# EAGLE board Dendro (EAGLE 9.6.2)
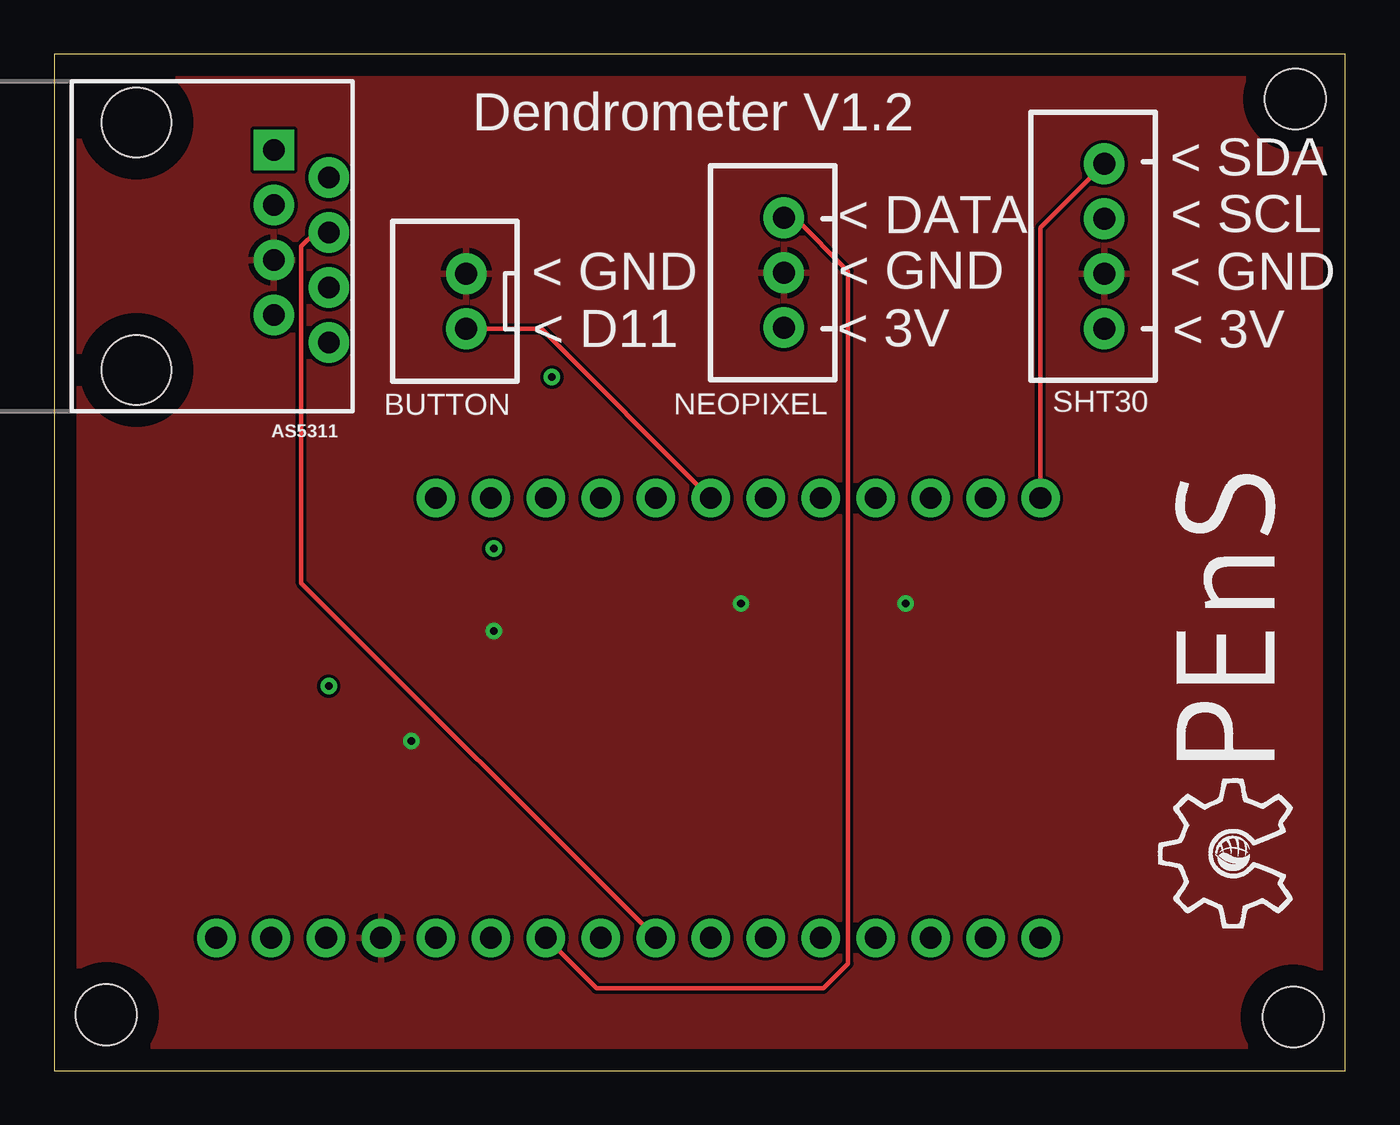
[diagram p0: board, top side]
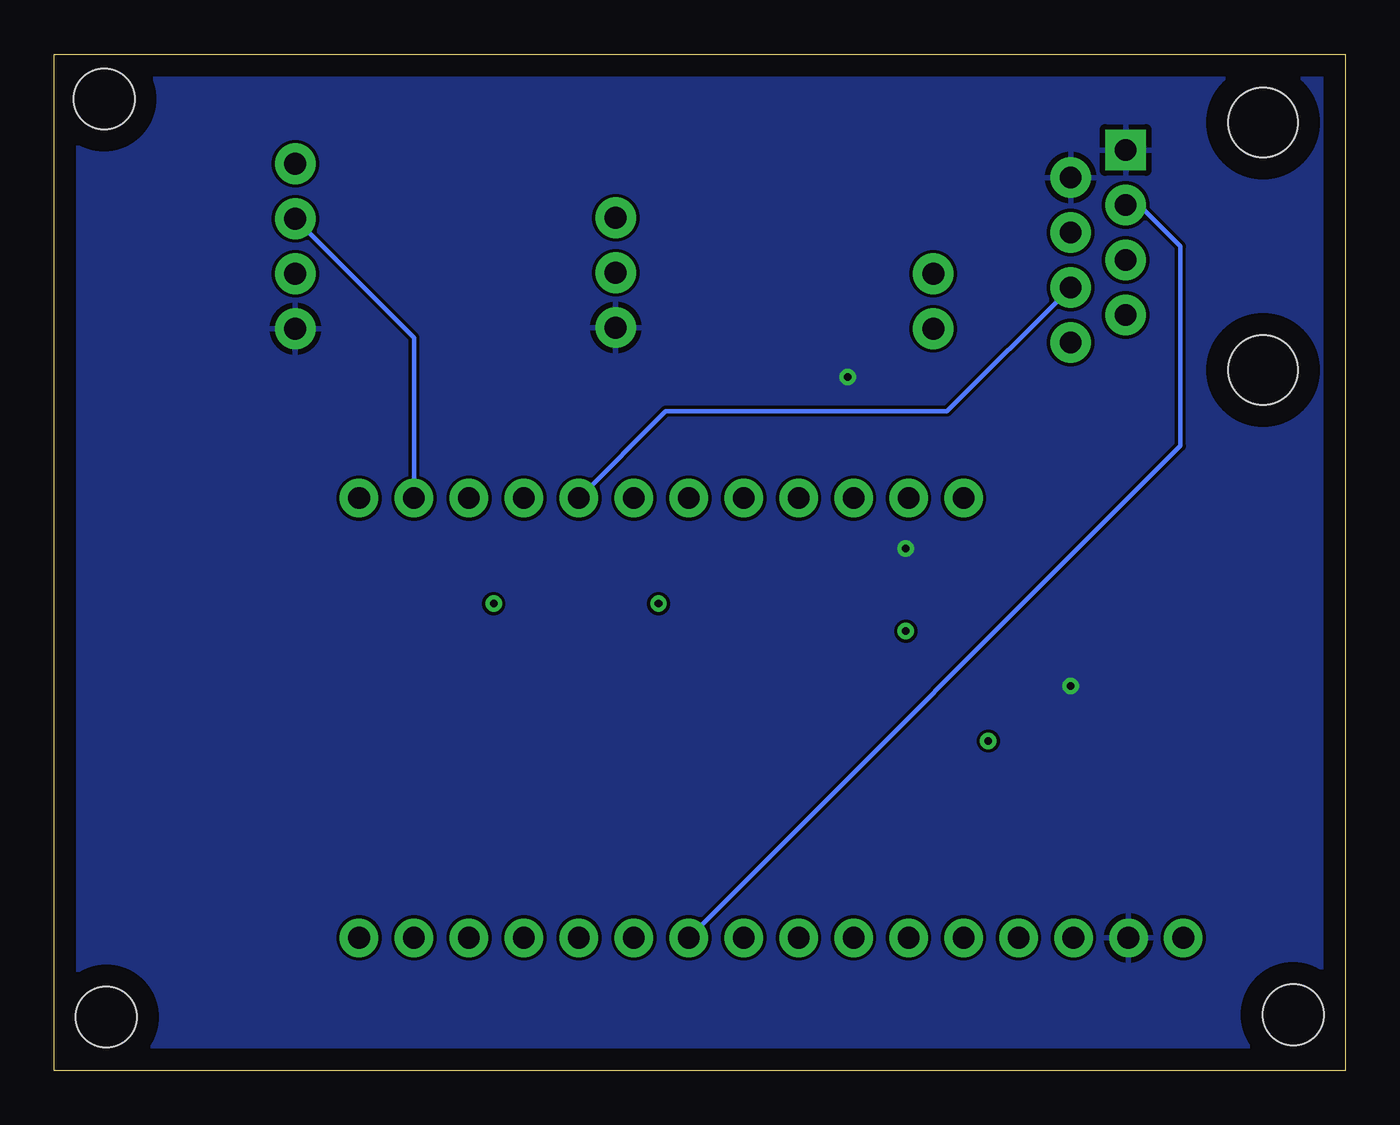
[diagram p1: board, bottom side, seen from below]

Size 59.69 x 46.98 mm. Coordinates in mm from the lower left corner, seen from the top.
Outline: 0,0 59.69,0 59.69,46.98 0,46.98 0,0
Copper layers (1*16): Top 0.035mm / dielectric 1.5mm / Bottom 0.035mm
Design rules "default": minimum track width 6mil, minimum drill 0.35mm, track to track 6mil, track to pad 6mil, pad to pad 6mil, via to via 6mil, smd to smd 6mil, copper to edge 40mil, drill to drill 6mil, minimum pad ring 10mil, minimum via ring 8mil, stop-mask expansion 4mil, vias tented up to drill 0mil, thermal gap 10mil
Holes 2.8 mm at 2.41,2.59 57.38,44.91 57.28,2.49

## Footprints (pad centres in the part's own frame; a part is rotated, then mirrored left to right if it is on the bottom)
RJ45-8 = drill 1 pad 1.88 square: 1 -4.445,6.35 | drill 1 pad 1.88: 2 -3.175,8.89; 3 -1.905,6.35; 4 -0.635,8.89; 5 0.635,6.35; 6 1.905,8.89; 7 3.175,6.35; 8 4.445,8.89 | hole 3.2: -5.715,0; 5.715,0
JST-XH-02-PACKAGE-ROUND-PAD = drill 1.016 pad 1.88: 1 -1.27,0; 2 1.27,0
FEATHERWING = drill 1 pad 1.778: 1 6.35,1.27; 2 8.89,1.27; 3 11.43,1.27; 4 13.97,1.27; 5 16.51,1.27; 6 19.05,1.27; 7 21.59,1.27; 8 24.13,1.27; 9 26.67,1.27; 10 29.21,1.27; 11 31.75,1.27; 12 34.29,1.27; 13 36.83,1.27; 14 39.37,1.27; 15 41.91,1.27; 16 44.45,1.27; 17 44.45,21.59; 18 41.91,21.59; 19 39.37,21.59; 20 36.83,21.59; 21 34.29,21.59; 22 31.75,21.59; 23 29.21,21.59; 24 26.67,21.59; 25 24.13,21.59; 26 21.59,21.59; 27 19.05,21.59; 28 16.51,21.59
JST-XH-03-PACKAGE-ROUND-PAD = drill 1.016 pad 1.88: 1 -2.54,0; 2 0,0; 3 2.54,0
JST-XH-04-PACKAGE-ROUND-PAD = drill 1.016 pad 1.88: 1 -3.81,0; 2 -1.27,0; 3 1.27,0; 4 3.81,0

## Placement (x,y rotation side)
AS5311  RJ45  [RJ45-8]  3.81,38.1 270 top
BUTTON  JST-XH-02-PIN-ROUND-PAD  [JST-XH-02-PACKAGE-ROUND-PAD]  19.05,35.56 90 top
MS1  FEATHERWING  [FEATHERWING]  1.14,4.88 0 top
NEOPIXEL  JST-XH-03-PIN-ROUND-PAD  [JST-XH-03-PACKAGE-ROUND-PAD]  33.73,36.88 90 top
SHT30  JST-XH-04-PIN-ROUND-PAD  [JST-XH-04-PACKAGE-ROUND-PAD]  48.54,38.1 90 top
U$1  [OPENS-LOGO]  60.96,6.35 90 top

## Library data of the parts
AS5311 = SparkFun-Connectors; PROD_ID: CONN-08506; SF_ID: PRT-00643
BUTTON NEOPIXEL SHT30 = Rembrandt Electronics - JST XH Connectors v1-0
MS1 = modifiedAdafruit
U$1 = opens-logo

## Nets
3VRAIL: AS5311.1 AS5311.2 MS1.2 NEOPIXEL.1 SHT30.1
A2: MS1.7 NEOPIXEL.3
CSN: AS5311.6 MS1.21
D11: BUTTON.1 MS1.23
DO: AS5311.4 MS1.9
GND: AS5311.5 BUTTON.2 MS1.4 NEOPIXEL.2 SHT30.2
SCL: MS1.18 SHT30.3
SCLK: AS5311.3 MS1.10
SDA: MS1.17 SHT30.4

## Tracks (layer width: path | path; a pad name or v marks a point on that pad's centre or on a via)
3VRAIL  (via drill 0.35)
  other vias: 12.7,17.78 20.32,24.13 23.01,32.05
  pour Bottom: 0,0 0,46.99 59.69,46.99 59.69,0
A2
  Top 0.203: MS1.7 25.07,3.81 35.56,3.81 36.7,4.95 36.7,36.96 34.24,39.42 NEOPIXEL.3
CSN
  Bottom 0.203: AS5311.6 18.41,30.48 31.42,30.48 MS1.21
D11
  Top 0.203: BUTTON.1 22.53,34.29 MS1.23
DO
  Top 0.203: MS1.9 11.43,22.53 11.43,38.1 12.06,38.73 AS5311.4
GND  (via drill 0.35)
  other vias: 16.51,15.24 20.32,20.32 31.75,21.59 39.37,21.59
  pour Top: 0,0 0,46.99 59.69,46.99 59.69,0
SCL
  Bottom 0.203: MS1.18 43.05,33.88 SHT30.3
SCLK
  Bottom 0.203: MS1.10 7.62,28.88 7.62,38.1 9.53,40 AS5311.3
SDA
  Top 0.203: MS1.17 45.59,38.96 SHT30.4

## Text on the board
tPlace: Dendrometer V1.2
tNames: < SDA | < DATA | < SCL | < GND | < GND | < GND | < D11 | < 3V | < 3V